# Altium PCB dFire.PcbDoc
Units mm, origin at the board's own origin, x right, y up, seen from the top; angles counter-clockwise.
Board outline 83 x 83 mm, 2 copper layers (Top Layer, Bottom Layer); 75 components, 40 nets, 254 pads, 9 vias.
Unrouted connection lines stored in the file: 3.
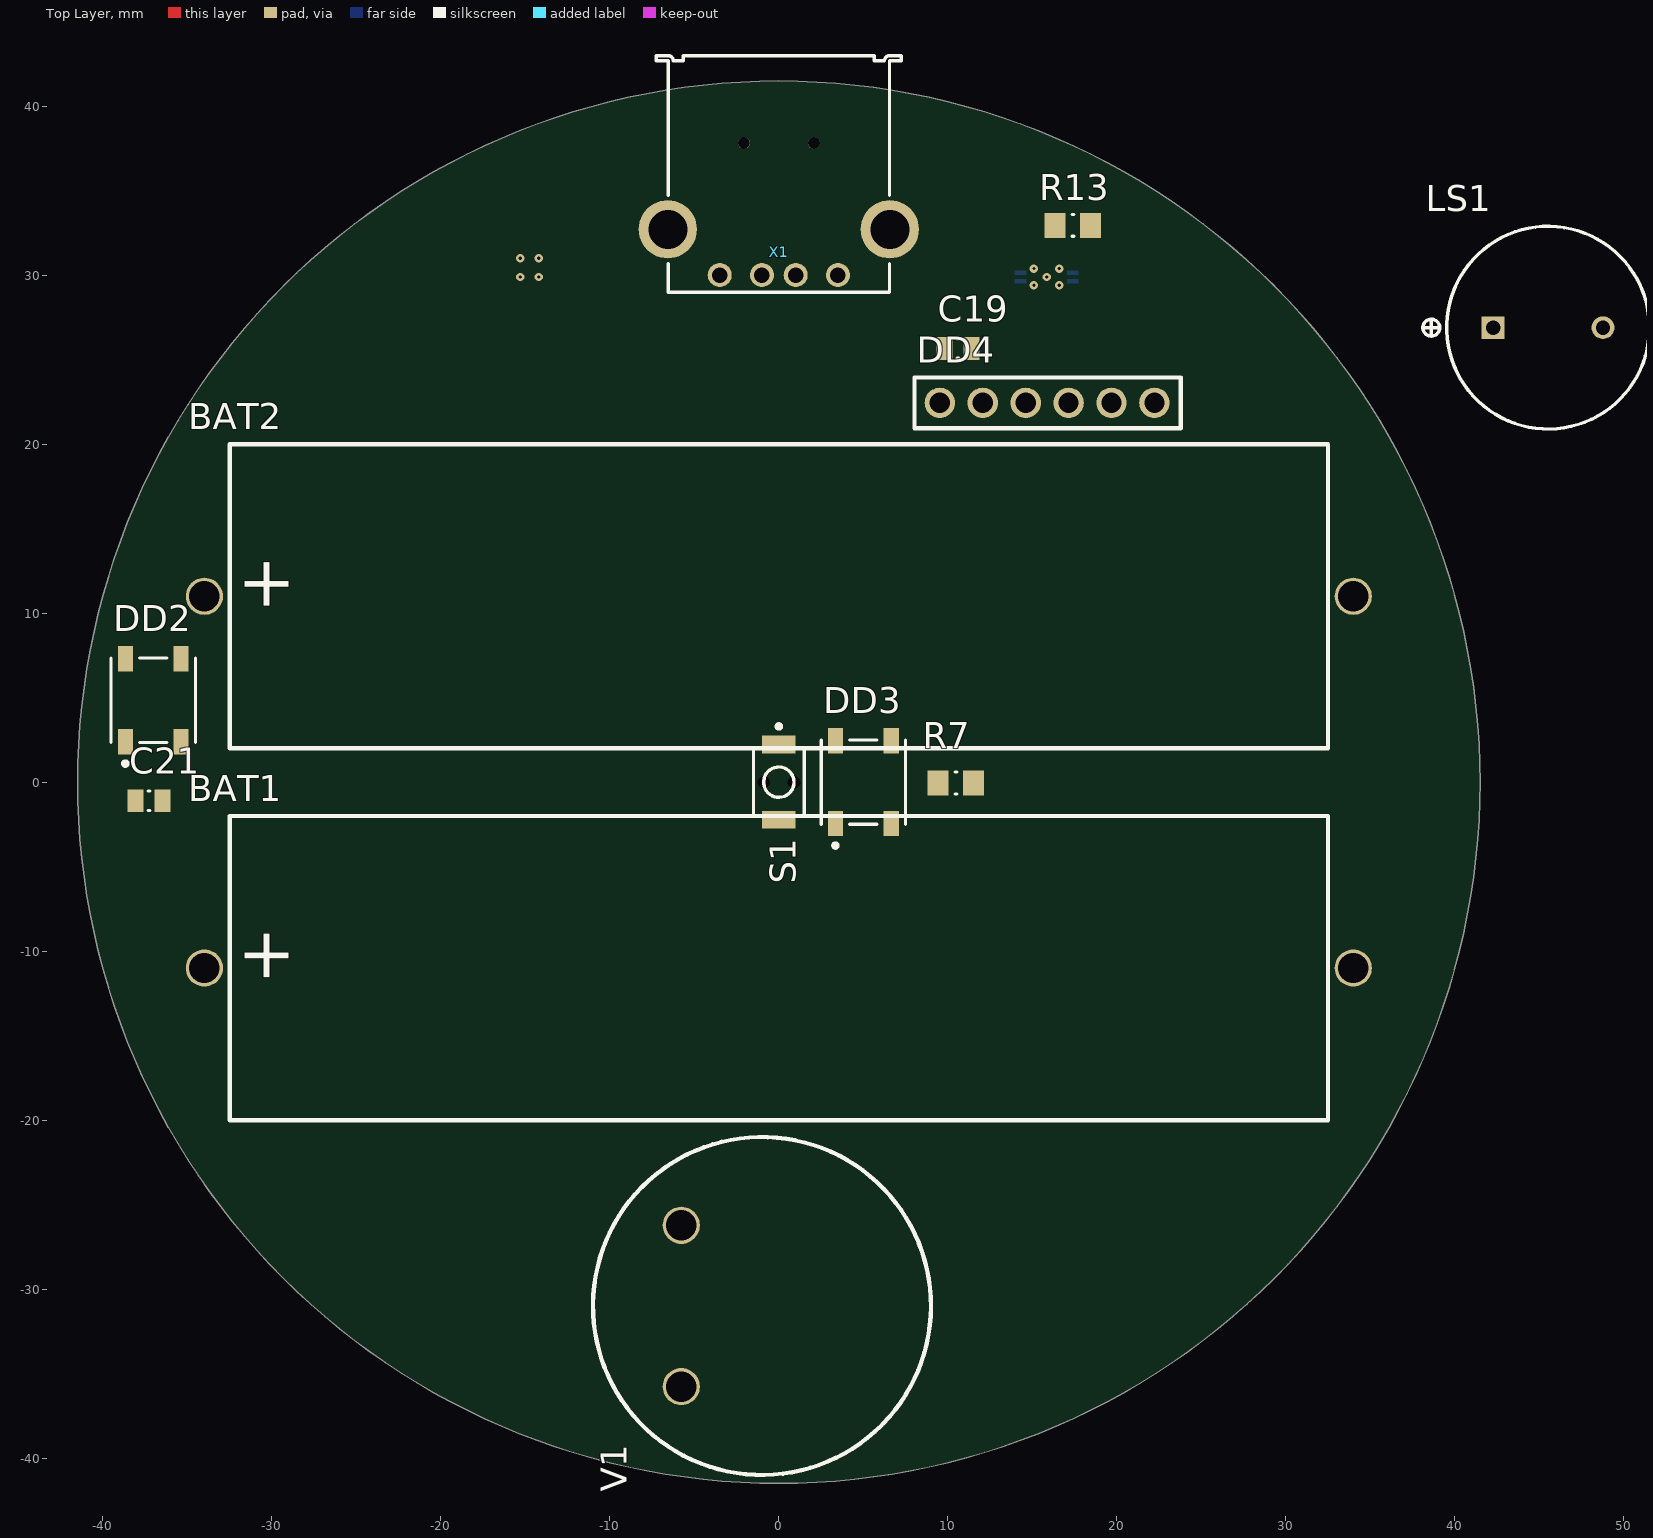
[diagram p0: Top Layer view]
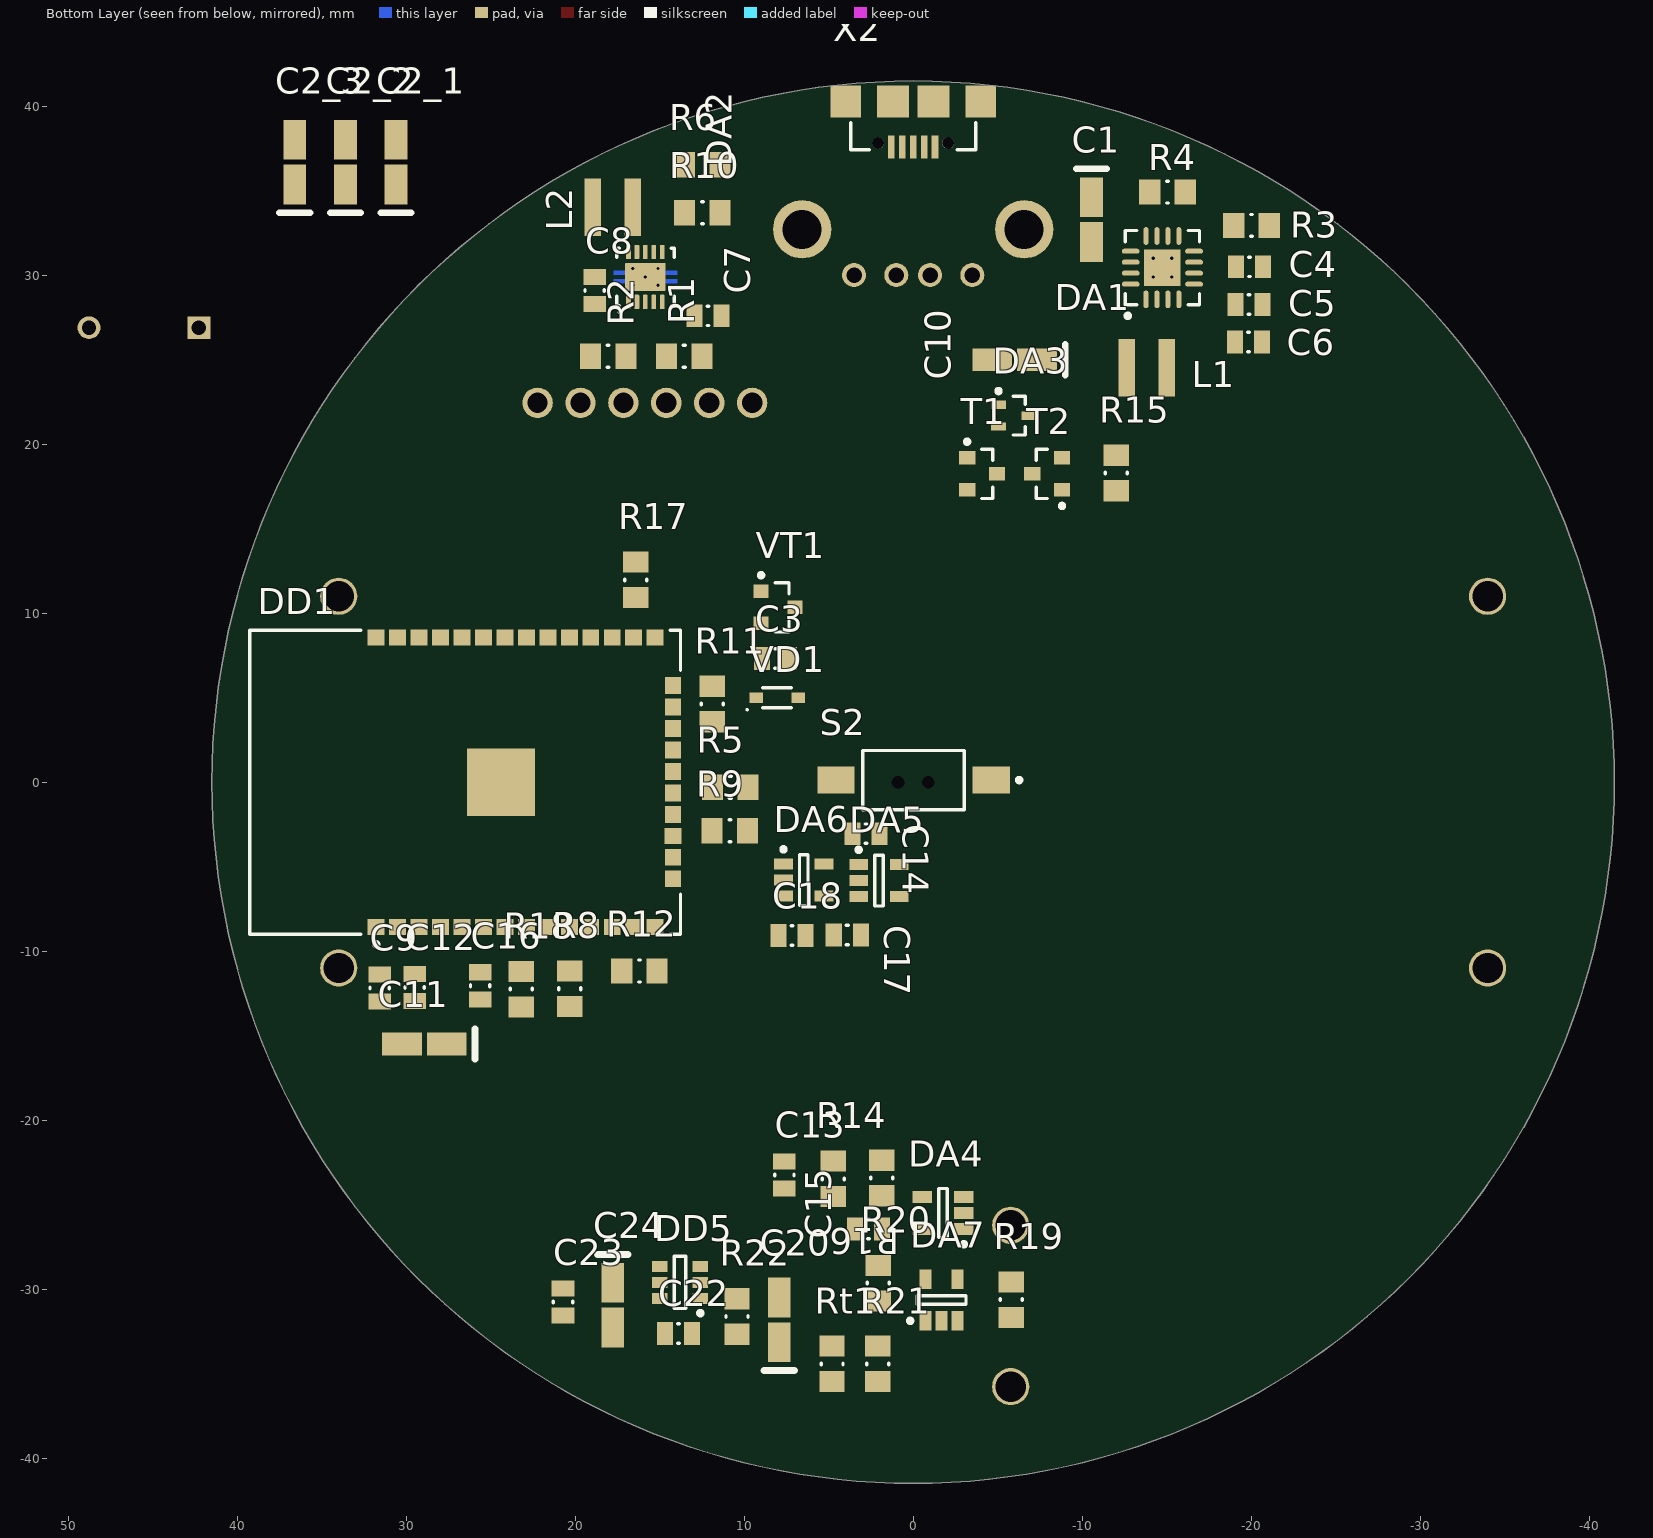
[diagram p1: Bottom Layer view, seen from below]

## Layer stack, top to bottom
Top Solder: solder mask 0.0102, Solder Resist, Dk 3.5
Top Layer: signal copper 0.0356
Dielectric 1: dielectric 0.32, FR-4, Dk 4.8
Bottom Layer: signal copper 0.0356
Bottom Solder: solder mask 0.0102, Solder Resist, Dk 3.5

## Board outline
-41.5,0 ccw(c0,0) 0,-41.5 ccw(c0,0) 41.5,0 ccw(c0,0) 0,41.5 ccw(c0,0)

## Design rules (kind name [scope] priority, off if disabled: settings)
Clearance [All] p1: gap=0.125 ignorepadtopadclearanceinfootprint=FALSE except(0: Arc-Hole Track-Hole SMDPad-Hole THPad-Hole Via-Hole Fill-Hole Poly-Hole Region-Hole Text-Hole)
PolygonConnect [All] p1: connectstyle=Relief reliefconductorwidth=0.254 reliefentries=4 polygonreliefangle="90 Angle" airgapwidth=0.254
RoutingVias [All] p1: holewidth=0.711 width=1.27 viastyle="Through Hole" minholewidth=0.711 minwidth=1.27 maxholewidth=0.711 maxwidth=1.27
SolderMaskExpansion [All] p1: expansion=0.102
Width [All] p1: maxlimit=0.254 minlimit=0.254 preferedwidth=0.254
30 further rules are at their usual default settings.

## Components (designator, comment, footprint, x,y, rotation, side; value= is the part's Value field where it differs from the comment)
BAT1 "bateery" battery 0,-11 r90 top locked
BAT2 "bateery" battery 0,11 r90 top locked
C1 "22uF" KEMT-A-3216-18-2_M -10.55,33.3 r270 bottom
C2_1 "22uF" KEMT-A-3216-18-2_M 30.6,36.7 r90 bottom
C2_2 "22uF" KEMT-A-3216-18-2_M 33.6,36.7 r90 bottom
C2_3 "22uF" KEMT-A-3216-18-2_M 36.6,36.7 r90 bottom
C3 "10uF" CAPC0805(2012)155_L 8.15,7.325 r180 bottom value=4.7uF
C4 "100nF" CAPC0805(2012)155_L -19.9,30.5 r0 bottom value=4.7uF
C5 "0.22uF" CAPC0805(2012)155_L -19.875,28.275 r0 bottom value=4.7uF
C6 "10uF" CAPC0805(2012)155_L -19.85,26.05 r180 bottom value=4.7uF
C7 "100nF" CAPC0805(2012)155_L 12.15,27.6 r180 bottom value=4.7uF
C8 "10mF" CAPC0805(2012)155_L 18.85,29.1 r90 bottom value=4.7uF
C9 "0.1uF" CAPC0805(2012)155_L 31.575,-12.175 r90 bottom value=4.7uF
C10 "100uF" KEMT-A-3216-18-2_M -6,25 r0 bottom
C11 "100uF" KEMT-A-3216-18-2_M 28.925,-15.5 r0 bottom
C12 "1nF" CAPC0805(2012)155_L 29.5,-12.15 r90 bottom value=4.7uF
C13 "0.1uF" CAPC0805(2012)155_L 7.625,-23.25 r90 bottom value=4.7uF
C14 "1uF" CAPC0805(2012)155_L 2.8,-3.05 r180 bottom value=4.7uF
C15 "1uF" CAPC0805(2012)155_L 2.65,-26.45 r0 bottom value=4.7uF
C16 "100nF" CAPC0805(2012)155_L 25.625,-12.05 r90 bottom value=4.7uF
C17 "1uF" CAPC0805(2012)155_L 3.9,-9.05 r180 bottom value=4.7uF
C18 "1uF" CAPC0805(2012)155_L 7.175,-9.075 r0 bottom value=4.7uF
C19 "0.1uF" CAPC0805(2012)155_L 10.6,25.675 r180 top value=4.7uF
C20 "47uF" KEMT-A-3216-18-2_M 7.925,-31.825 r90 bottom
C21 "0.1uF" CAPC0805(2012)155_L -37.275,-1.1 r180 top value=4.7uF
C22 "0.1uF" CAPC0805(2012)155_L 13.9,-32.625 r0 bottom value=4.7uF
C23 "0.1uF" CAPC0805(2012)155_L 20.725,-30.775 r90 bottom value=4.7uF
C24 "10uF" KEMT-A-3216-18-2_M 17.775,-30.95 r270 bottom
DA1 "LTC4001EUF-1#PBF" LT-UF-16_N -14.75,30.45 r90 bottom
DA2 "TPS61230DRCR" DRC0010G_V 15.85,29.9 r90 bottom
DA3 "TCM810SVLB713" SC70-LB3_L -5.95,21.7 r180 bottom
DA4 "AD8603AUJ-REEL" ADI-UJ-5_M -1.775,-25.5 r0 bottom
DA5 "LD3985M122R" SOT23-5L_N 2.025,-5.825 r180 bottom
DA6 "LD3985M122R" SOT23-5L_N 6.475,-5.8 r180 bottom
DA7 "AD8603AUJ-REEL" ADI-UJ-5_M -1.675,-30.65 r90 bottom
DD1 "ESP-WROOM-32" OLMX-ESP-WROOM-32 23,0 r90 bottom
DD2 "WS2812B" ADAI-WS2812B_V -37.025,4.85 r90 top
DD3 "WS2812B" ADAI-WS2812B_V 5,0 r90 top
DD4 "bme280" BME280 9.53,22.45 r90 top
DD5 "MCP3421A2T-E/CH" SOT-23-CH6_L 13.8,-29.6 r0 bottom
L1 "1uH" COIL-XFL4020_V -13.825,24.525 r0 bottom
L2 "1uH" COIL-XFL4020_V 17.775,34.025 r180 bottom
LS1 "cy-12085G-5042" CZCY-CY-12085G-5042-2_V 45.525,26.9 r0 top
R1 "402k" RESC0805(2012)_M 13.55,25.2 r0 bottom value="4.30 Ohm"
R2 "100k" RESC0805(2012)_M 18.05,25.2 r0 bottom value="4.30 Ohm"
R3 "549" RESC0805(2012)_M -20.025,32.95 r0 bottom value="4.30 Ohm"
R4 "549" RESC0805(2012)_M -15.05,34.925 r180 bottom value="4.30 Ohm"
R5 "470" RESC0805(2012)_M 10.825,-0.3 r0 bottom value="4.30 Ohm"
R6 "1M" RESC0805(2012)_M 12.475,36.55 r0 bottom value="4.30 Ohm"
R7 "470" RESC0805(2012)_M 10.475,-0.05 r0 top value="4.30 Ohm"
R8 "100k" RESC0805(2012)_M 20.325,-12.225 r90 bottom value="4.30 Ohm"
R9 "47k" RESC0805(2012)_M 10.85,-2.875 r180 bottom value="4.30 Ohm"
R10 "8.2k" RESC0805(2012)_M 12.475,33.7 r180 bottom value="4.30 Ohm"
R11 "470" RESC0805(2012)_M 11.9,4.625 r270 bottom value="4.30 Ohm"
R12 "47k" RESC0805(2012)_M 16.2,-11.175 r180 bottom value="4.30 Ohm"
R13 "100k" RESC0805(2012)_M 17.4,32.95 r180 top value="4.30 Ohm"
R14 "150k" RESC0805(2012)_M 4.725,-23.475 r90 bottom value="4.30 Ohm"
R15 "47k" RESC0805(2012)_M -12.025,18.3 r90 bottom value="4.30 Ohm"
R16 "1M" RESC0805(2012)_M 1.85,-23.425 r270 bottom value="4.30 Ohm"
R17 "470" RESC0805(2012)_M 16.425,11.975 r270 bottom value="4.30 Ohm"
R18 "10k" RESC0805(2012)_M 23.2,-12.25 r270 bottom value="4.30 Ohm"
R19 "200" RESC0805(2012)_M -5.8,-30.625 r90 bottom value="4.30 Ohm"
R20 "120k" RESC0805(2012)_M 2.075,-29.65 r270 bottom value="4.30 Ohm"
R21 "100k" RESC0805(2012)_M 2.1,-34.425 r270 bottom value="4.30 Ohm"
R22 "100" RESC0805(2012)_M 10.425,-31.625 r90 bottom value="4.30 Ohm"
Rt1 "47k" RESC0805(2012)_M 4.8,-34.425 r270 bottom value="4.30 Ohm"
S1 "TVAF06" JNFU-TVAF06_V 0,0 r270 top
S2 "FSMSMTR" TECO-FSMSMTR_V -0.025,0.125 r0 bottom
T1 "IRLML6401TRPBF" INTR-SOT-23-3_V -4.075,18.25 r270 bottom
T2 "IRLML6401TRPBF" INTR-SOT-23-3_V -7.925,18.25 r90 bottom
V1 "ME2 CO" "ME2 CO" -1,-31 r315 top
VD1 "BAT 54" INF-SOD323_V 8.05,5 r90 bottom
VT1 "BC817-25LT1G" ONSC-SOT-23-3-318-08_V 8,10.35 r180 bottom
X1 "61400416021" 61400416021 0,36 r180 top locked
X2 "629105136821" 629105136821 0,40.275 r0 bottom locked

## Footprints (in the part's own frame and the unit in brackets; to place one, negate y for a bottom-side part, rotate by r counter-clockwise, add the part's x,y. Pads: shape width x height; smd on the part's side, far side on the other; paste and mask are expansions set on the pad)
61400416021 [mm] "USB 2.0 Type A Horizontal"
  round 1.42 hole 0.92: 1(-3.5,5.99) 2(-1,5.99) 3(1,5.99) 4(3.5,5.99)
  round 3.45 hole 2.3: Shell(-6.57,3.28) Shell(6.57,3.28)
  silkscreen extent -7.25,-7 7.25,7, body extent -8,-7 8,7, height 7.63
629105136821 [mm] "Micro USB 2.0 SMT Type B Horizontal 5 Contacts"
  rect 0.4x1.35 smd: 1(-1.3,2.675) 2(-0.65,2.675) 3(0,2.675) 4(0.65,2.675) 5(1.3,2.675)
  round 0.7 hole 0.7 unplated: MH1(-2.075,2.45) MH2(2.075,2.45)
  rect 1.8x1.9 smd: Shell(-4,0) Shell(4,0)
  rect 1.9x1.9 smd: Shell(-1.2,0) Shell(1.2,0)
  silkscreen extent -3.7,1.25 3.7,2.85, body extent -4,-2.73 4,3.17, height 2.69
ADAI-WS2812B_V [mm] "SMD, 4-Leads, Body 5x5mm, Pitch 3.3mm"
  rect 1.5x0.9 smd: 1(-2.45,1.65) 2(-2.45,-1.65) 3(2.45,-1.65) 4(2.45,1.65)
  silkscreen extent -3.87,-2.5 2.5,2.5, body extent -2.7,-2.5 2.7,2.5, height 1.69
ADI-UJ-5_M [mm] "SOT23, 5-Leads, Body 2.9x1.6mm, Pitch 0.95mm, IPC Low Density"
  rect 1.15x0.7 smd: 1(-1.225,0.95) 2(-1.225,0) 3(-1.225,-0.95) 4(1.225,-0.95) 5(1.225,0.95)
  silkscreen extent -1.35,-1.45 0.25,1.97, body extent -0.8,-1.45 0.8,1.45, height 1
battery [mm]
  round 2.2 hole 1.8: 1(0,34) 2(0,-34)
  silkscreen extent -9,-32.5 9,32.5
BME280 [mm]
  round 1.8 hole 1.2: 1(0,0) 2(0,-2.54) 3(0,-5.08) 4(0,-7.62) 5(0,-10.16) 6(0,-12.7)
  silkscreen extent -1.5,-14.25 1.5,1.5
CAPC0805(2012)155_L [mm] "Chip Capacitor, Body 2.0x1.2mm, Height 1.55mm, IPC High Density"
  rect 0.95x1.35 smd: 1(-0.8,0) 2(0.8,0)
  silkscreen extent -0.05,-0.58 0.05,0.58, body extent -1.1,-0.72 1.1,0.72, height 1.55
COIL-XFL4020_V [mm] "SMD, 2-Leads, Body 4x4mm, Pitch 2.37mm"
  rect 0.98x3.4 smd paste+0: 1(-1.185,0) 2(1.185,0)
  body extent -2,-2 2,2, height 2.1
CZCY-CY-12085G-5042-2_V [mm] "Through-hole Buzzer, 2-Leads, Dia 12mm, Height 8.5mm"
  rect 1.35x1.35 hole 0.85: 1(-3.25,0)
  round 1.35 hole 0.85: 2(3.25,0)
  Mechanical 13 keep-out circle w0.1: c0,0 r6
  silkscreen extent -7.41,-6 6,6, body extent -6,-6 6,6, height 8.5
DRC0010G_V [mm] "SON, 10-Leads, Body 3x3mm, Pitch 0.5mm, Thermal Pad 2.4x1.65mm, TI Recommended"
  rrect36% 0.85x0.28 smd paste-0.025 mask+0.07: 1(-1.475,1) 2(-1.475,0.5) 3(-1.475,0) 4(-1.475,-0.5) 5(-1.475,-1) 6(1.475,-1) 7(1.475,-0.5) 8(1.475,0) 9(1.475,0.5) 10(1.475,1)
  rrect6% 1.65x2.4 smd paste-0.825 mask+0.07: 11(0,0)
  Top Layer region: -0.39,1.9 -0.11,1.9 -0.11,1.2 -0.39,1.2
  Top Layer region: 0.39,1.2 0.11,1.2 0.11,1.9 0.39,1.9
  Top Layer region: 0.39,-1.9 0.11,-1.9 0.11,-1.2 0.39,-1.2
  Top Layer region: -0.39,-1.2 -0.11,-1.2 -0.11,-1.9 -0.39,-1.9
  silkscreen extent -2.15,-1.7 1.7,1.7, body extent -1.55,-1.55 1.55,1.55, height 1
INF-SOD323_V [mm] "SOD, 2-Leads, Body 1.7x1.25 mm"
  rect 0.6x0.8 smd: 1(0,1.25) 2(0,-1.25)
  silkscreen extent -0.76,-0.85 0.6,1.83, body extent -0.63,-0.85 0.63,0.85, height 1.1
INTR-SOT-23-3_V [mm] "SOT23, 3-Leads, Body 2.92x1.3mm, Pitch 1.9mm"
  rect 0.802x0.972 smd: 1(-0.95,-0.885) 2(0.95,-0.885) 3(0,0.885)
  silkscreen extent -2.03,-1.01 1.46,0.64, body extent -1.46,-0.65 1.46,0.65, height 1.12
JNFU-TVAF06_V [mm] "Switch, Push Button, SMD, 2-Leads, Body 3x4mm"
  rect 1.05x2 smd: 1(-2.225,0) 2(2.225,0)
  round 0.4 hole 0.75 unplated: MH1(0,0.9) MH2(0,-0.9)
  silkscreen extent -3.42,-1.5 2,1.5, body extent -2,-1.5 2,1.5, height 2
KEMT-A-3216-18-2_M [mm] "Molded TAN Capacitor, 2-Leads, Body 3.4x1.8mm, IPC Low Density"
  rect 2.35x1.35 smd: 1(-1.325,0) 2(1.325,0)
  silkscreen extent -3,-0.9 -3,0.9, body extent -1.7,-0.9 1.7,0.9, height 1.8
LT-UF-16_N [mm] "QFN, 16-Leads, Body 4.1x4.1mm, Pitch 0.65mm, Thermal Pad 2.15x2.15mm, IPC Medium Density"
  oval 1.05x0.3 smd: 1(-1.875,0.975) 2(-1.875,0.325) 3(-1.875,-0.325) 4(-1.875,-0.975) 9(1.875,-0.975) 10(1.875,-0.325) 11(1.875,0.325) 12(1.875,0.975)
  oval 0.3x1.05 smd: 5(-0.975,-1.875) 6(-0.325,-1.875) 7(0.325,-1.875) 8(0.975,-1.875) 13(0.975,1.875) 14(0.325,1.875) 15(-0.325,1.875) 16(-0.975,1.875)
  rect 2.15x2.15 smd: 17(0,0)
  silkscreen extent -2.97,-2.2 2.2,2.2, body extent -2.05,-2.05 2.05,2.05, height 0.8
"ME2 CO" [mm]
  round 2.2 hole 1.8: 1(-6.75,0) 2(0,-6.75)
  silkscreen extent -10,-10 10,10
OLMX-ESP-WROOM-32 [mm] "SMD, 38-Leads, Body 18x25.5mm, Pitch 1.27mm"
  rect 0.95x1 smd: 1(-8.575,8.78) 2(-8.575,7.51) 3(-8.575,6.24) 4(-8.575,4.97) 5(-8.575,3.7) 6(-8.575,2.43) 7(-8.575,1.16) 8(-8.575,-0.11) 9(-8.575,-1.38) 10(-8.575,-2.65) 11(-8.575,-3.92) 12(-8.575,-5.19) 13(-8.575,-6.46) 14(-8.575,-7.73) 17(-3.175,-8.78) 25(8.575,-7.73) 26(8.575,-6.46) 27(8.575,-5.19) 28(8.575,-3.92) 29(8.575,-2.65) 30(8.575,-1.38) 31(8.575,-0.11) 32(8.575,1.16) 33(8.575,2.43) 34(8.575,3.7) 35(8.575,4.97) 36(8.575,6.24) 37(8.575,7.51) 38(8.575,8.78)
  rect 4x4 smd: 1(0,1.395)
  rect 1x0.95 smd: 15(-5.715,-8.78) 16(-4.445,-8.78) 18(-1.905,-8.78) 19(-0.635,-8.78) 20(0.635,-8.78) 21(1.905,-8.78) 22(3.175,-8.78) 23(4.445,-8.78) 24(5.715,-8.78)
  silkscreen extent -9.72,-9.23 9,16.27, body extent -9.04,-9.25 9.03,16.29, height 3.04
ONSC-SOT-23-3-318-08_V [mm] "SOT23, 3-Leads, Body 2.92x1.3mm, Pitch 0.95mm"
  rect 0.9x0.8 smd: 1(-1,0.95) 2(-1,-0.95) 3(1,0)
  silkscreen extent -1.13,-1.46 0.65,2.02, body extent -0.65,-1.46 0.65,1.46, height 1.11
RESC0805(2012)_M [mm] "Chip Resistor, Body 2.0x1.3mm, IPC Low Density"
  rect 1.25x1.5 smd: 1(-1.05,0) 2(1.05,0)
  silkscreen extent -0.05,-0.65 0.05,0.65, body extent -1.1,-0.67 1.1,0.67, height 0.7
SC70-LB3_L [mm] "SOT323, 3-Leads, Body 2.0x1.3mm, Pitch 0.65mm, Lead Span 2.1mm, IPC High Density"
  rect 0.9x0.5 smd: 1(-0.9,0.65) 2(-0.9,-0.65) 3(0.9,0)
  silkscreen extent -1.02,-1.15 0.68,1.57, body extent -0.67,-1.12 0.68,1.13, height 1.1
SOT23-5L_N [mm] "SOT23, 5-Leads, Body 2.9x1.6mm, Pitch 0.95mm, Lead Span 2.8mm, IPC Medium Density"
  rect 1.1x0.65 smd: 1(-1.2,0.95) 2(-1.2,0) 3(-1.2,-0.95) 4(1.2,-0.95) 5(1.2,0.95)
  silkscreen extent -1.33,-1.5 0.25,1.95, body extent -0.87,-1.5 0.87,1.5, height 1.45
SOT-23-CH6_L [mm] "SOT23, 6-Leads, Body 2.9x1.7mm, Pitch 0.95mm, Lead Span 2.8mm, IPC High Density"
  rect 0.9x0.65 smd: 1(-1.2,0.95) 2(-1.2,0) 3(-1.2,-0.95) 4(1.2,-0.95) 5(1.2,0) 6(1.2,0.95)
  silkscreen extent -1.32,-1.55 0.35,1.95, body extent -0.9,-1.55 0.9,1.55, height 1.45
TECO-FSMSMTR_V [mm] "SMD, 2-Leads, Body 6x3.5mm, Pitch 9.19mm"
  rect 2.2x1.6 smd: 1(-4.595,0)
  rect 2.18x1.6 smd: 2(4.595,0)
  silkscreen extent -6.37,-1.75 3,1.75, body extent -4.98,-1.75 4.98,1.75, height 4.4

## Part data
C1 C2_1 C2_2 C2_3 C10 C11 C20 C24: library part CMP-2000-05172-1, Capacitance=10µF, ESR (Equivalent Series Resistance)=3.8Ohm, Lifetime @ Temp.=2000Hrs@85degC, Manufacturer=Kemet, Manufacturer Size Code=A, Operating Temperature=-55degC~125degC, Package / Case=1206(3216Metric), Package Description="2-Pin Surface Mount Device, Body 3.2 x 1.6 mm", Package Reference=1206, Standard Package=2,000, Tolerance=±10%, Voltage - Rated=10V, Catalog Drawings=T49x,T5xxSeries_A-side1T49x,T5xxSeries_A,B-side2T49x,T5xxSeries_A,SBottom, Category=Capacitors, Datasheet URL=http://www.farnell.com/datasheets/1824869.pdf, Datasheet Version=Apr-14, Family=TantalumCapacitors, Features=GeneralPurpose, Height - Seated (Max)="0.071\"(1.80mm)", Lead Spacing=-, Manufacturer URL=http://www.kemet.com/, Mounting Type=SurfaceMount, Online Catalog=T491Series, Other Names=399-3684-2, Packaging=Tape&Reel(TR), Product Training Modules=CapacitorBasics-TypicalUsesforCapacitorsDeratingGuidelinesforSurfaceMountTantalumCapacitors, Series=T491, Size / Dimension="0.126\"Lx0.063\"W(3.20mmx1.60mm)", Type=Molded
C3 C4 C5 C6 C7: library part CMP-1036-04882-1, "CAP 4.7uF 10V ±10% 0805 (2012  Thickness 1.55mm SMD", Case-EIA=0805, Case-Metric=2012, Rated Voltage="10 V", Tolerance=A±10%, Max Thickness="1.55 mm", Technology=SMT
C8 C9 C12 C13 C14 C15 C16 C17 C18 C19 C21 C22 C23: library part CMP-1036-04882-1, "CAP 4.7uF 10V ±10% 0805 (2012 Metric) Thickness 1.55mm SMD", Case-EIA=0805, Case-Metric=2012, Rated Voltage="10 V", Tolerance=A±10%, Max Thickness="1.55 mm", Technology=SMT
DA1: library part CMP-0471-00567-1, "2 A Synchronous Buck Li-Ion Charger, 4 to 5.5 V Vin, 16-pin QFN (UF-16), -40 to 85 degC, Pb-Free", Float Voltage="4.1 V", Manufacturer="Linear Technology", Max Charge Current(A)=2, Battery Chemistry="Li-Ion, Li-Polymer", Charge Termination=Timer, Code_JEDEC=MO-220, ComponentLink1Description="Manufacturer URL", ComponentLink1URL=http://www.linear.com/, ComponentLink2Description=Datasheet, ComponentLink2URL=http://cds.linear.com/docs/en/datasheet/40011fa.pdf, ComponentLink3Description="Package Specification", ComponentLink3URL=http://cds.linear.com/docs/en/packaging/QFN_16_05-08-1692.pdf, DatasheetVersion="Rev. A", Mounting Technology="Surface Mount", Number of Cells=1, PackageDescription="16-Pin Plastic QFN, Body 4 x 4 mm, Pitch 0.65 mm", PackageReference=UF-16, PackageVersion=Jun-10, PartNumber=LTC4001EUF-1#PBF, RoHS=TRUE, Type of Charger=Switching, Vin Max(V)=5.5, Vin Min(V)=4
DA2: library part CMP-0347-00087-2, "Boost Converter with 5 A Switch, 2.3 to 5.5 V Input Voltage, 2.5 to 5.5 V Output Voltage, -40 to 85 degC, 10-Pin SON (DRC), Green (RoHS & no Sb/Br), Tape and Reel", Manufacturer="Texas Instruments", Rating=Catalog, Switch Current Limit (Typ) (A)=5, Switching Frequency (Max) (kHz)=2000, Temperature Range="-40 to 85 degC", Undervoltage Lockout=Fixed, ComponentLink1Description="Manufacturer URL", ComponentLink1URL=http://www.ti.com/, ComponentLink2Description=Datasheet, ComponentLink2URL=http://www.ti.com/lit/ds/symlink/tps61230.pdf, ComponentLink3Description="Package Specification", ComponentLink3URL=http://www.ti.com/lit/ds/symlink/tps61230.pdf, DatasheetVersion=SLVSAQ2A, Iq (Typ) (mA)=0.035, Mounting Technology="Surface Mount", PackageDescription="10-Pin Plastic Small Outline No-Lead, Body 3 x 3 mm, Pitch 0.5 mm", PackageReference=DRC0010G, PackageVersion=SLVSAQ2A, Packing="Tape and Reel", PartNumber=TPS61230DRCR, Regulated Outputs (#)=1, Vin (V)="2.3 to 5.5", Vout (V)="2.5 to 5.5"
DA3: library part CMP-0138-00306-1, "3-Pin Microcontroller Reset Monitors, 3-Pin SC-70", DatasheetVersion="revD, Mar-2005", PackageDescription="3-Lead Plastic Small Outline Transistor (LB) [SC70]", PackageReference=SC70-LB3, PackageVersion="revBB, Aug-2009"
DA4 DA7: library part CMP-0384-02070-2, "Single Channel Single-Supply Operation Operational Amplifier, 400 KHz BW, 100 mV/us SR, Industrial, 5-pin SOT23 (UJ-5), Reel", Amplifiers Per Package=1, Generic Part Number=AD8603, Input Bias Current=200fA, Input Offset Voltage=12uV, Manufacturer="Analog Devices", Code_JEDEC=MO-193-AB, ComponentLink1Description="Manufacturer URL", ComponentLink1URL=http://www.analog.com/en/index.html, ComponentLink2Description=Datasheet, ComponentLink2URL=http://www.analog.com/static/imported-files/data_sheets/AD8603_8607_8609.pdf, ComponentLink3Description="Package Specification", ComponentLink3URL=http:/www.analog.com/static/imported-files/packages/PKG_PDF/TSOT(UJ)/UJ_5.pdf, ComponentLink4Description="Reference Circuit", ComponentLink4URL=http://www.analog.com/en/all-operational-amplifiers-op-amps/operational-amplifiers-op-amps/ad8603/products/product.html#product-recommendations, DatasheetVersion="Rev. C", Iq/Amp=50uA, Mounting Technology="Surface Mount", PackageDescription="5-Pin Thin Small Outline Transistor Package, Body 2.9 x 1.6 mm, Pitch 0.95 mm", PackageReference=UJ-5, PackageVersion=100708-A, PartNumber=AD8603AUJ-REEL, RevisionNote="Reference Circuit URL fixed", Slew Rate=100mV/us, Small Signal Bandwidth=400KHz, V Span Max=6V, V Span Min=1.8V
DA5 DA6: library part CMP-0244-00329-1, "150mA, Ultra-Low Drop Low Noise BiCMOS Voltage Regulators Low ESR Capacitors Compatible, 1.22V, 5-Pin SOT23-5L", ComponentLink1Description="Manufacturer URL", ComponentLink1URL=http://www.st.com, ComponentLink2Description=Datasheet, ComponentLink2URL=http://www.st.com/internet/com/TECHNICAL_RESOURCES/TECHNICAL_LITERATURE/DATASHEET/CD00003395.pdf, DatasheetVersion=3/01/2011, PackageDescription="5-Pin SOT-23 Package, 2.9 x 1.6 mm Body, 0.95 mm Pitch, 2.8 mm Lead Span", PackageReference=SOT23-5L, PackageVersion=1/01/2008
DD1: library part CMP-2000-07454-1, "Espressif System, 2.7 to 3.6 V, -40 to 85 degC, 38-Pin SMD", Manufacturer=Olimex, Package Description="38-Pin Surface Mount Device, Body 18 x 25.5 mm, Pitch 1.27 mm", Datasheet URL=http://www.espressif.com/sites/default/files/documentation/esp-wroom-32_datasheet_en.pdf, Datasheet Version="Rev. 2.1, 09/2017", Manufacturer URL=https://www.olimex.com, Mounting Technology=SurfaceMount, Package Reference=ESP-WROOM-32, RoHSCompliant=false
DD2 DD3: library part CMP-1740-00005-1, "Intelligent Control LED Integrated Light Source, 3.5 to 5.3 V, -25 to 80 degC, 4-Pin SMD, RoHS, Bulk", Case\Package=Radial, Current Rating="240 mA", Max Operating Temperature="125 degC", Min Operating Temperature="-55 degC", Package Quantity=200, Tolerance=10%, ComponentLink1Description="Manufacturer URL", ComponentLink1URL=https://www.adafruit.com/, ComponentLink2Description=Datasheet, ComponentLink2URL=https://cdn-shop.adafruit.com/datasheets/WS2812B.pdf, DatasheetVersion=May-13, Height="12.2 mm", Lead Pitch="5 mm", Length="12.2 mm", Mount="Through Hole", PackageDescription="4-Pin Surface Mount Device, Body 5 x 5 mm, Pitch 3.3 mm", PackageReference=WS2812B, Packaging=Bulk, Pins=2, Radiation Hardening=No, REACH SVHC="No SVHC", RoHSCompliant=true, Shielding=Unshielded
DD5: library part CMP-0188-00097-2, "18-Bit Analog-to-Digital Converter with I2C Interface and On-Board Reference, 6-Pin SOT-23, Extended Temperature, Tape and Reel", Code_IPC=SOT26A-6, ComponentLink1Description="Manufacturer URL", ComponentLink1URL=http://www.microchip.com/, ComponentLink2Description=Datasheet, ComponentLink2URL=http://ww1.microchip.com/downloads/en/DeviceDoc/22003e.pdf, ComponentLink3Description="Package Specification", ComponentLink3URL=http://www.microchip.com/stellent/groups/techpub_sg/documents/packagingspec/en012702.pdf, DatasheetVersion="revE, Aug-2009", PackageDescription="6-Lead Plastic Small Outline Transistor (CH) [SOT-23]", PackageReference=SOT-23-CH6, PackageVersion="revBB, Aug-2009", RevisionNote="URLs added."
L1 L2: library part CMP-2000-07423-1, Case Height=2.1mm, Case Length=4.3mm, Manufacturer=Coilcraft, Maximum DC Current=11A, Maximum DC Resistance=11.9mOhms, Operating Temperature Range=-40Cto+125C, Package Description="2-Pin Surface Mount Device, Body 4 x 4 mm, Pitch 2.37 mm", Package Reference=XFL4020, Self Resonant Frequency=64MHz, Test Frequency=100kHz, Tolerance=20%, =XFL4020-102MEB, Case Width=4.3mm, Core Material=Composite, Datasheet URL=http://www.mouser.com/ds/2/597/xfl4020-270756.pdf, Datasheet Version=07/2012, Dimensions=4.3mmWx4.3mmLx2.1mmH, Inductance=1uH, Manufacturer URL=http://www.coilcraft.com/, Mounting Technology=SurfaceMount, Packaging=Reel, Product=PowerInductors, RoHS=Details, Series=XFL4020, Shielding=Shielded, Termination Style=SMD/SMT
LS1: library part CMP-1019-00001-1, "Buzzer, 5 V, 42 Ohm, -20 to 70 degC, 2-Pin THD, Dia 12 mm, Height 8.5 mm, RoHS, Tray", Current Consumption (Max.)="35 mA", Manufacturer="Changzhou Chaoyin", Operating Temperature Range="-20 to 70 degC", Oscillation Frequency="2.048 KHz", Rated Voltage="5 V", Resistance Value="42 +/- 4 Ohm", Mounting Technology="Through Hole", PackageDescription="2-Pin Through-hole Buzzer, Dia 12 mm, Height 8.5 mm", PackageReference=CY-12085G-5042, Packing=Tray, PartNumber=cy-12085G-5042, RoHS=TRUE, Sound Pressure Level (Min.)="85 dB"
R1 R2 R3 R4 R5 R6 R7 R8 R9 R10 R11 R12 R13 R14 R15 R16 R17 R18 R19 R20 R21 R22 Rt1: library part CMP-1013-00017-1, Case-EIA=0805, Case-Metric=2012, Power="0.125 W", Tolerance="5 %", Technology=SMT
S1: library part CMP-0587-00001-2, "Switch, SPST Push Button, 50 mA, 12 V DC, SMD, -30 to 85 degC, RoHS", Contact Resistance="100 mW max", Dielectric Strength="250 V AC for 1 min", Insulation Resistance="100 MW min. 100 V DC", Manufacturer=Jianfu, Operating Temperature="-30 to 85 degC", Rating="50 mA. 12 V DC", ComponentLink1Description="Manufacturer URL", ComponentLink1URL=http://www.jian-fu.com/, ComponentLink2Description=Datasheet, ComponentLink2URL=http://en.jian-fu.com/product-22.html, Lifetime="100000 Cycles min", Mounting Technology="Surface Mount", PackageDescription="2-Pin Switch, Push Button, SMD, Body 2.9 x 3.9 mm", PackageReference=TVAF06, PartNumber=TVAF06, RoHS=TRUE, Travel="0.13 +/- 0.05 mm"
S2: library part CMP-2000-07501-1, "FSMSM Push Button Switch, 50 mA, -35 to 85 degC, 2-Pin SMD, RoHS, Tape and Reel", Case\/Package=SMD/SMT, Contact Current Rating=50mA, Contact Resistance=100mOhm, Manufacturer="TE Connectivity", Max Operating Temperature=85degC, Max Voltage Rating (DC)=12V, Min Operating Temperature=-35degC, Operating Force=180gf, Package Description="2-Pin Surface Mount Device, Body 6 x 3.5 mm, Pitch 9.19 mm", Package Quantity=1800, Voltage Rating (DC)=24V, Actuator Length=1.07mm, Actuator Material=Polyamide, Contact Material=Brass, Contact Plating=Silver, Current Rating=50mA, Datasheet URL=http://www.te.com/commerce/DocumentDelivery/DDEController?Action=showdoc&DocId=Customer+Drawing%7F1437566-3%7FC2%7Fpdf%7FEnglish%7FENG_CD_1437566-3_C2_1437566_3_1_c.dwg.pdf%7F1437566-4, Datasheet Version="Rev. C2, 08/2014", Electrical Life=20000Cycles, ELV=Compliant, Illumination Type=Illuminated, Lead Free=LeadFree, Manufacturer URL=http://www.te.com/, Mechanical Life=20000Cycles, Mount=SurfaceMount, Mounting Technology=SurfaceMount, Orientation=Straight, Package Reference=FSMSMTR, Packaging=TapeandReel, REACH SVHC=Unknown, RoHSCompliant=true, Switch Travel=0.25mm, Termination=GullWing, Throw Configuration=SPST
T1 T2: library part CMP-2000-04986-1, "HEXFET(R) Power P-Channel MOSFET, -12 V, -4.3 A, -55 to 150 degC, 3-Pin SOT-23, RoHS, Tape and Reel", Forward Diode Voltage=-1.2V, Manufacturer="International Rectifier", Maximum Continuous Drain Current=-3.4A, Maximum Drain Source Resistance=0.085?, Maximum Drain Source Voltage=-12V, Maximum Gate Source Voltage=±8V, Maximum Operating Temperature=+150degC, Maximum Power Dissipation=1.3W, Minimum Operating Temperature=-55degC, Operating Temperature Range=-55to+150degC, Package Description="3-Pin Small Outline Transistor, Body 2.92 x 1.3 mm, Pitch 0.95 mm", Package Reference=SOT-23-3, Package Type=Micro3, Typical Input Capacitance @ Vds=830pF@-10V, Category=PowerMOSFET, Channel Mode=Enhancement, Channel Type=P, Configuration=Single, Datasheet URL=http://datasheet.octopart.com/IRLML6401TRPBF-International-Rectifier-datasheet-10898914.pdf, Datasheet Version=May-10, Dimensions=3.04x1.40x1.02mm, Forward Transconductance=8.6S, Height=1.02mm, Length=3.04mm, Manufacturer URL=http://internationalrectifier.com/, Mounting Type=SurfaceMount, Number of Elements per Chip=1, Pin Count=3, Series=HEXFETSeries, Typical Gate Charge @ Vgs=10nC@-5V, Typical TurnOff Delay Time=32ns, Typical Turn On Delay Time=11ns, Width=1.4mm
VD1: library part CMP-1182-00006-1, "Silicon Schottky Diode, SOD323, Reel, Green", Manufacturer=Infineon, PartNumber="BAT 54-03W E6327", ComponentLink1Description="Manufacturer URL", ComponentLink1URL=http://www.infineon.com/, ComponentLink2Description=Datasheet, ComponentLink2URL=http://www.infineon.com/dgdl/bat54series.pdf?folderId=db3a30431400ef68011425f1ca2505e3&fileId=db3a304314dca3890115190b74210ea6, ComponentLink3Description="Package Specification", ComponentLink3URL=http://www.infineon.com/dgdl/SOD323-Package_Overview.pdf?folderId=db3a30431936bc4b011952aab84f3bbe&fileId=db3a30431936bc4b011952beed653be3, Green=TRUE, Mounting Technology="Surface Mount", PackageDescription="2-Pin Small Outline Diode Package, 1.25 x 1.7 mm Body", PackageReference=SOD323, Packing=Reel, RevisionNote="Lost Devices pt2"
VT1: library part CMP-1048-00737-1, "General Purpose Transistor, NPN Silicon, 3-Pin SOT-23, Pb-Free, Tape and Reel", Manufacturer="On Semiconductor", ComponentLink1Description="Manufacturer URL", ComponentLink1URL=http://www.onsemi.com/, ComponentLink2Description=Datasheet, ComponentLink2URL=http://www.onsemi.com/pub_link/Collateral/BC817-16LT1-D.PDF, ComponentLink3Description="Package Specification", ComponentLink3URL=http://www.onsemi.cn/pub_link/Collateral/318-08.PDF, DatasheetVersion="Rev. 12", fT Min (MHz)=100, IC Continuous (A)=0.5, Mounting Technology="Surface Mount", PackageDescription="3-Pin Small Outline Transistor, Body 2.92 x 1.3 mm, Pitch 0.95 mm", PackageReference=SOT-23-3-318-08, PackageVersion="Rev. AP, 11/2009", Packing="Tape and Reel", PartNumber=BC817-25LT1G, Polarity=NPN, RoHS=TRUE
X1: library part CMP-1502-03227-1, "USB 2.0 Type A Receptacle WR-COM, Horizontal, THT", Contact Resistance=20mOhm, Manufacturer="Wurth Elektronik", Operating Temperature=-40to105degC, Rated Current=1.5A, Working Voltage=30VAC, Connector Type=USB2.0TypeA, Datasheet URL=https://katalog.we-online.de/em/datasheet/61400416021.pdf, Gender=Receptacle, Manufacturer URL=http://www.we-online.de, Mounting Technology=THT, Orientation=Horizontal, Package Reference=61400416021, Packaging=Tray, Part Number=61400416021, Publisher=WurthElektronik
X2: library part CMP-1502-03253-1, "Micro USB 2.0 Type B Receptacle WR-COM, Horizontal, SMT, with Pads and Pegs", Contact Resistance=30mOhm, Manufacturer="Wurth Elektronik", Operating Temperature=-40to105degC, Rated Current=1A, Working Voltage=30VAC, Connector Type=MicroUSB2.0TypeB, Datasheet URL=https://katalog.we-online.de/em/datasheet/629105136821.pdf, Gender=Receptacle, Manufacturer URL=http://www.we-online.de, Mounting Technology=SMT, Orientation=Horizontal, Package Reference=629105136821, Packaging=TapeandReel, Part Number=629105136821, Publisher=WurthElektronik

## Via types
v1: diameter 0.5, hole 0.2, Top Layer to Bottom Layer, 9 vias

## Nets (pads, with @x,y where several pads share a name; then routed paths per layer and width w, separated by ;. In a path a pad name is that pad's centre, name@x,y a point inside that pad or via, vN(x,y) a via of type N, cw(c..) or ccw(c..) an arc to the next point about the centre after c; other vN are vias at no path point)
3V: C15.1 C17.2 C19.2 C23.2 C24.1 DA4.5 DA5.3 DA7.5 DD4.1 DD5.5 R16.2
GND: BAT1.2 BAT2.2 C1.2 C2_1.2 C2_2.2 C2_3.2 C3.2 C4.2 C5.2 C6.1 C7.2 C8.1 C9.1 C10.2 C11.2 C12.1 C13.1 C14.1 C15.2 C16.1 C17.1 C18.1 C19.1 C21.1 C22.2 C23.1 C24.2 DA1.3 DA1.4 DA1.6 DA1.11 DA1.17 DA2.11 DA3.1 DA4.2 DA5.1 DA6.1 DA7.2 DD1.1 DD1.15 DD1.38 DD2.3 DD3.3 DD4.2 DD5.2 DD5.6 LS1.2 R2.2 R3.2 R4.2 R7.2 R8.1 R10.1 R14.1 R18.2 VD1.2 X1.4 X1.Shell X2.5 X2.Shell
  other v1: 15.1,29.4 16.6,29.4 -15.3,29.9 -14.2,29.9 15.85,29.9 15.1,30.4 16.6,30.4 -15.3,31 -14.2,31
NetBAT1_1: BAT1.1 BAT2.1 C6.2 C10.1 DA1.1 DA1.16 DA3.3 R15.2 T1.2 T2.2
NetC1_1: C1.1 DA1.8 DA1.9 X2.1
NetC2_1_1: C2_1.1 C2_2.1 C2_3.1 DA2.3 DA2.4 R1.1 R6.1 X1.1
NetC3_1: C3.1 LS1.1 VD1.1 VT1.2
NetC4_1: C4.1 DA1.14
NetC5_1: C5.1 DA1.15
NetC7_1: C7.1 DA2.6
NetC8_2: C8.2 DA2.10 L2.1 R13.1 S2.1 T1.3 T2.3
NetC13_2: C13.2 DA4.3 R14.2 R16.1
NetC16_2: C16.2 DD1.3 R18.1
NetC20_1: C20.1 DA7.1 R21.2 R22.1 Rt1.2
NetC20_2: C20.2 DA7.4 R19.2 R20.1 V1.1
NetC22_1: C22.1 DD5.1 R22.2
NetDA1_2: DA1.2 L1.2
NetDA1_5: DA1.5 L1.1
NetDA1_12: DA1.12 R4.1
NetDA1_13: DA1.13 R3.1
NetDA2_1: DA2.1 DA2.2 L2.2
NetDA2_5: DA2.5 R6.2
NetDA2_7: DA2.7 R1.2 R2.1
NetDA2_8: DA2.8 R10.2
NetDA2_9: DA2.9 R11.1 R13.2
NetDA3_2: DA3.2 R15.1 T1.1 T2.1
NetDA4_1: DA4.1 DA4.4 DA7.3 R19.1 V1.2
NetDD1_10: DD1.10 R8.2 R12.1
NetDD1_17: DD1.17 R5.2
NetDD1_18: DD1.18 R9.1 S1.1
NetDD1_19: DD1.19 R11.2
NetDD1_26: DD1.26 R17.2
NetDD1_33: DD1.33 DD4.4 DD5.4
NetDD1_36: DD1.36 DD4.3 DD5.3
NetDD2_2: DD2.2 DD3.4
NetDD2_4: DD2.4 R17.1
NetR5_1: R5.1 VT1.1
NetR7_1: R7.1 S1.2
NetR20_2: R20.2 R21.1 Rt1.1
"V bat": C14.2 C21.2 DA5.2 DA6.2 DD2.1 DD3.1 R12.2 S2.2 VT1.3
"V ESP": C9.2 C11.1 C12.2 C18.2 DA6.3 DD1.2 R9.2
pads on no net: DA1.7 DA1.10 DA5.4 DA5.5 DA6.4 DA6.5 DD1.4 DD1.5 DD1.6 DD1.7 DD1.8 DD1.9 DD1.11 DD1.12 DD1.13 DD1.14 DD1.16 DD1.20 DD1.21 DD1.22 DD1.23 DD1.24 DD1.25 DD1.27 DD1.28 DD1.29 DD1.30 DD1.31 DD1.32 DD1.34 DD1.35 DD1.37 DD3.2 DD4.5 DD4.6 S1.MH1 S1.MH2 X1.2 X1.3 X2.2 X2.3 X2.4 X2.MH1 X2.MH2

## Keep-outs
Mechanical 1:
  circle w0.5: c0,0 r41.5

## Silkscreen, mask and mechanical layers (free items; w line width, h text height)
Mechanical 1:
  circle w0.254: c0,0 r43.5

## Text inside footprints (layer, text, board x,y; h text height)
BAT1: Top Overlay "+" at -29,-12 h3 r90
BAT2: Top Overlay "+" at -29,10 h3 r90
X1: Mechanical 2 "PCB Edge" at 2.2,44.22 h0.81 r180
X2: Mechanical 2 "PCB Edge" at -1.2,42.375 h0.41 r180